# Altium PCB PCB1.PcbDoc
Units mm, origin at the board's own origin, x right, y up, seen from the top; angles counter-clockwise.
Board outline 75 x 33 mm, 2 copper layers (Top Layer, Bottom Layer); 60 components, 31 nets, 120 pads, 0 vias.
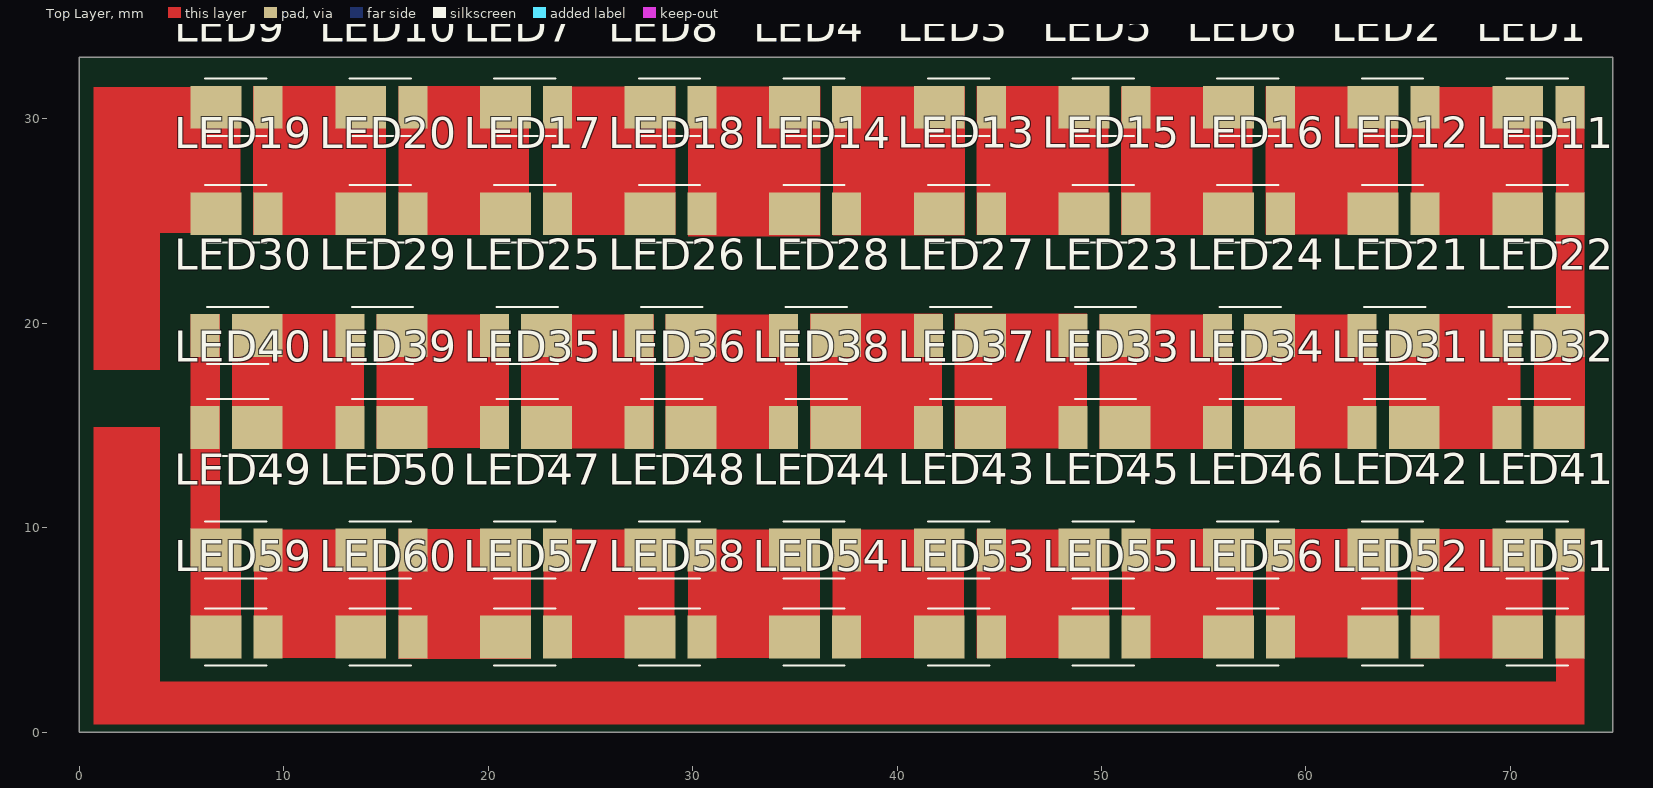
[diagram p0: Top Layer view]
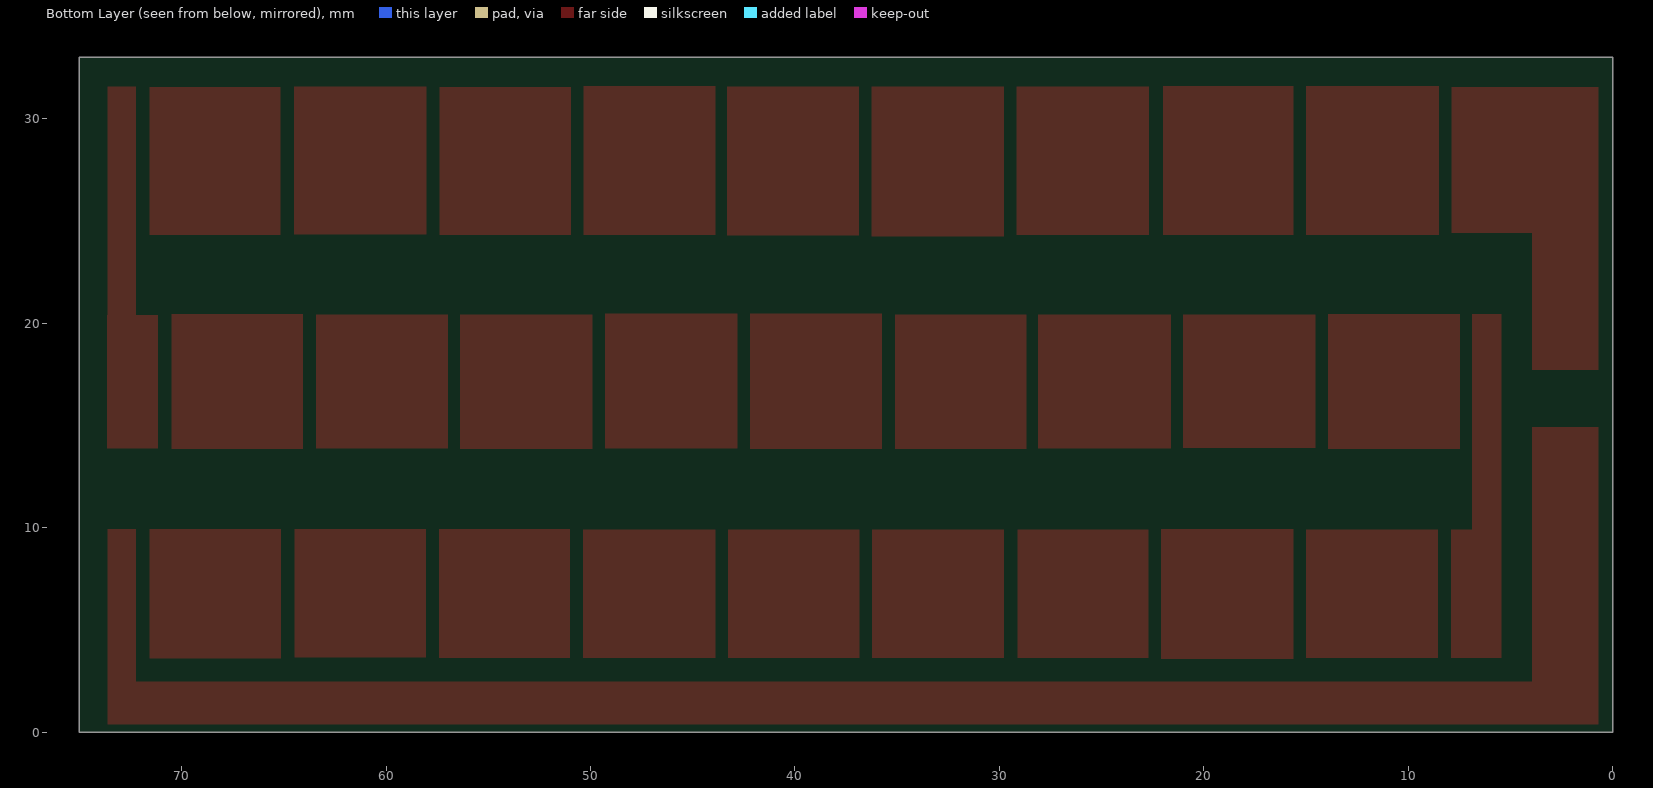
[diagram p1: Bottom Layer view, seen from below]

## Layer stack, top to bottom
Top Solder: solder mask 0.0102, Solder Resist, Dk 3.5
Top Layer: signal copper 0.0356
Dielectric 1: dielectric 0.32, FR-4, Dk 4.8
Bottom Layer: signal copper 0.0356
Bottom Solder: solder mask 0.0102, Solder Resist, Dk 3.5

## Board outline
0,0 75,0 75,33 0,33

## Design rules (kind name [scope] priority, off if disabled: settings)
Clearance [All] p1: gap=0.254 ignorepadtopadclearanceinfootprint=FALSE except(0: Arc-Hole Track-Hole SMDPad-Hole THPad-Hole Via-Hole Fill-Hole Poly-Hole Region-Hole Text-Hole)
PolygonConnect [All] p1: connectstyle=Relief reliefconductorwidth=0.254 reliefentries=4 polygonreliefangle="90 Angle" airgapwidth=0.254
RoutingVias [All] p1: holewidth=0.711 width=1.27 viastyle="Through Hole" minholewidth=0.711 minwidth=1.27 maxholewidth=0.711 maxwidth=1.27
SolderMaskExpansion [All] p1: expansion=0.102 istentingtop=FALSE
Width [All] p1: maxlimit=0.254 minlimit=0.254 preferedwidth=0.254
30 further rules are at their usual default settings.

## Components (designator, comment, footprint, x,y, rotation, side; value= is the part's Value field where it differs from the comment)
LED1 "ASMW-LA00-AUW0E" ASMWLA00AUW0E 71.31,30.56 r0 top
LED2 "ASMW-LA00-AUW0E" ASMWLA00AUW0E 64.236,30.56 r0 top
LED3 "ASMW-LA00-AUW0E" ASMWLA00AUW0E 43.012,30.56 r0 top
LED4 "ASMW-LA00-AUW0E" ASMWLA00AUW0E 35.938,30.56 r0 top
LED5 "ASMW-LA00-AUW0E" ASMWLA00AUW0E 50.087,30.56 r0 top
LED6 "ASMW-LA00-AUW0E" ASMWLA00AUW0E 57.161,30.56 r0 top
LED7 "ASMW-LA00-AUW0E" ASMWLA00AUW0E 21.789,30.56 r0 top
LED8 "ASMW-LA00-AUW0E" ASMWLA00AUW0E 28.863,30.56 r0 top
LED9 "ASMW-LA00-AUW0E" ASMWLA00AUW0E 7.64,30.56 r0 top
LED10 "ASMW-LA00-AUW0E" ASMWLA00AUW0E 14.714,30.56 r0 top
LED11 "ASMW-LA00-AUW0E" ASMWLA00AUW0E 71.31,25.35 r0 top
LED12 "ASMW-LA00-AUW0E" ASMWLA00AUW0E 64.236,25.35 r0 top
LED13 "ASMW-LA00-AUW0E" ASMWLA00AUW0E 43.012,25.35 r0 top
LED14 "ASMW-LA00-AUW0E" ASMWLA00AUW0E 35.938,25.35 r0 top
LED15 "ASMW-LA00-AUW0E" ASMWLA00AUW0E 50.087,25.35 r0 top
LED16 "ASMW-LA00-AUW0E" ASMWLA00AUW0E 57.161,25.35 r0 top
LED17 "ASMW-LA00-AUW0E" ASMWLA00AUW0E 21.789,25.35 r0 top
LED18 "ASMW-LA00-AUW0E" ASMWLA00AUW0E 28.863,25.35 r0 top
LED19 "ASMW-LA00-AUW0E" ASMWLA00AUW0E 7.64,25.35 r0 top
LED20 "ASMW-LA00-AUW0E" ASMWLA00AUW0E 14.714,25.35 r0 top
LED21 "ASMW-LA00-AUW0E" ASMWLA00AUW0E 64.346,19.4 r180 top
LED22 "ASMW-LA00-AUW0E" ASMWLA00AUW0E 71.42,19.4 r180 top
LED23 "ASMW-LA00-AUW0E" ASMWLA00AUW0E 50.197,19.4 r180 top
LED24 "ASMW-LA00-AUW0E" ASMWLA00AUW0E 57.271,19.4 r180 top
LED25 "ASMW-LA00-AUW0E" ASMWLA00AUW0E 21.899,19.4 r180 top
LED26 "ASMW-LA00-AUW0E" ASMWLA00AUW0E 28.973,19.4 r180 top
LED27 "ASMW-LA00-AUW0E" ASMWLA00AUW0E 43.122,19.4 r180 top
LED28 "ASMW-LA00-AUW0E" ASMWLA00AUW0E 36.048,19.4 r180 top
LED29 "ASMW-LA00-AUW0E" ASMWLA00AUW0E 14.824,19.4 r180 top
LED30 "ASMW-LA00-AUW0E" ASMWLA00AUW0E 7.75,19.4 r180 top
LED31 "ASMW-LA00-AUW0E" ASMWLA00AUW0E 64.346,14.9 r180 top
LED32 "ASMW-LA00-AUW0E" ASMWLA00AUW0E 71.42,14.9 r180 top
LED33 "ASMW-LA00-AUW0E" ASMWLA00AUW0E 50.197,14.9 r180 top
LED34 "ASMW-LA00-AUW0E" ASMWLA00AUW0E 57.271,14.9 r180 top
LED35 "ASMW-LA00-AUW0E" ASMWLA00AUW0E 21.899,14.9 r180 top
LED36 "ASMW-LA00-AUW0E" ASMWLA00AUW0E 28.973,14.9 r180 top
LED37 "ASMW-LA00-AUW0E" ASMWLA00AUW0E 43.122,14.9 r180 top
LED38 "ASMW-LA00-AUW0E" ASMWLA00AUW0E 36.048,14.9 r180 top
LED39 "ASMW-LA00-AUW0E" ASMWLA00AUW0E 14.824,14.9 r180 top
LED40 "ASMW-LA00-AUW0E" ASMWLA00AUW0E 7.75,14.9 r180 top
LED41 "ASMW-LA00-AUW0E" ASMWLA00AUW0E 71.31,8.9 r0 top
LED42 "ASMW-LA00-AUW0E" ASMWLA00AUW0E 64.236,8.9 r0 top
LED43 "ASMW-LA00-AUW0E" ASMWLA00AUW0E 43.012,8.9 r0 top
LED44 "ASMW-LA00-AUW0E" ASMWLA00AUW0E 35.938,8.9 r0 top
LED45 "ASMW-LA00-AUW0E" ASMWLA00AUW0E 50.087,8.9 r0 top
LED46 "ASMW-LA00-AUW0E" ASMWLA00AUW0E 57.161,8.9 r0 top
LED47 "ASMW-LA00-AUW0E" ASMWLA00AUW0E 21.789,8.9 r0 top
LED48 "ASMW-LA00-AUW0E" ASMWLA00AUW0E 28.863,8.9 r0 top
LED49 "ASMW-LA00-AUW0E" ASMWLA00AUW0E 7.64,8.9 r0 top
LED50 "ASMW-LA00-AUW0E" ASMWLA00AUW0E 14.714,8.9 r0 top
LED51 "ASMW-LA00-AUW0E" ASMWLA00AUW0E 71.31,4.65 r0 top
LED52 "ASMW-LA00-AUW0E" ASMWLA00AUW0E 64.236,4.65 r0 top
LED53 "ASMW-LA00-AUW0E" ASMWLA00AUW0E 43.012,4.65 r0 top
LED54 "ASMW-LA00-AUW0E" ASMWLA00AUW0E 35.938,4.65 r0 top
LED55 "ASMW-LA00-AUW0E" ASMWLA00AUW0E 50.087,4.65 r0 top
LED56 "ASMW-LA00-AUW0E" ASMWLA00AUW0E 57.161,4.65 r0 top
LED57 "ASMW-LA00-AUW0E" ASMWLA00AUW0E 21.789,4.65 r0 top
LED58 "ASMW-LA00-AUW0E" ASMWLA00AUW0E 28.863,4.65 r0 top
LED59 "ASMW-LA00-AUW0E" ASMWLA00AUW0E 7.64,4.65 r0 top
LED60 "ASMW-LA00-AUW0E" ASMWLA00AUW0E 14.714,4.65 r0 top

## Footprints (in the part's own frame and the unit in brackets; to place one, negate y for a bottom-side part, rotate by r counter-clockwise, add the part's x,y. Pads: shape width x height; smd on the part's side, far side on the other; paste and mask are expansions set on the pad)
ASMWLA00AUW0E [mm]
  rect 2.49x2.1 smd: 1(-0.95,0)
  rect 1.42x2.1 smd: 2(1.595,0)
  silkscreen extent -1.5,-1.4 1.5,1.4, body extent -1.75,-1.4 1.75,1.4, height 1

## Part data
LED1 LED2 LED3 LED4 LED5 LED6 LED7 LED8 LED9 LED10 LED11 LED12 LED13 LED14 LED15 LED16 LED17 LED18 LED19 LED20 LED21 LED22 LED23 LED24 LED25 LED26 LED27 LED28 LED29 LED30 LED31 LED32 LED33 LED34 LED35 LED36 LED37 LED38 LED39 LED40 LED41 LED42 LED43 LED44 LED45 LED46 LED47 LED48 LED49 LED50 LED51 LED52 LED53 LED54 LED55 LED56 LED57 LED58 LED59 LED60: "LED", Manufacturer_Name="Avago Technologies", Mouser Part Number=630-ASMW-LA00-AUW0E, Datasheet Link=https://docs.broadcom.com/docs/ASMW-LXXX-DS100, Height=0.9mm, Manufacturer_Part_Number=ASMW-LA00-AUW0E, Mouser Price/Stock=https://www.mouser.co.uk/ProductDetail/Broadcom-Avago/ASMW-LA00-AUW0E?qs=Mv7BduZupUh3TD%252BqME6K1Q%3D%3D

## Nets (pads, with @x,y where several pads share a name; then routed paths per layer and width w, separated by ;. In a path a pad name is that pad's centre, name@x,y a point inside that pad or via, vN(x,y) a via of type N, cw(c..) or ccw(c..) an arc to the next point about the centre after c; other vN are vias at no path point)
NetLED1_1: LED1.1 LED2.2 LED11.1 LED12.2
NetLED1_2: LED1.2 LED11.2 LED22.1 LED32.1
NetLED2_1: LED2.1 LED6.2 LED12.1 LED16.2
NetLED3_1: LED3.1 LED4.2 LED13.1 LED14.2
NetLED3_2: LED3.2 LED5.1 LED13.2 LED15.1
NetLED4_1: LED4.1 LED8.2 LED14.1 LED18.2
NetLED5_2: LED5.2 LED6.1 LED15.2 LED16.1
NetLED7_1: LED7.1 LED10.2 LED17.1 LED20.2
NetLED7_2: LED7.2 LED8.1 LED17.2 LED18.1
NetLED9_1: LED9.1 LED19.1
NetLED9_2: LED9.2 LED10.1 LED19.2 LED20.1
NetLED21_1: LED21.1 LED22.2 LED31.1 LED32.2
NetLED21_2: LED21.2 LED24.1 LED31.2 LED34.1
NetLED23_1: LED23.1 LED24.2 LED33.1 LED34.2
NetLED23_2: LED23.2 LED27.1 LED33.2 LED37.1
NetLED25_1: LED25.1 LED26.2 LED35.1 LED36.2
NetLED25_2: LED25.2 LED29.1 LED35.2 LED39.1
NetLED26_1: LED26.1 LED28.2 LED36.1 LED38.2
NetLED27_2: LED27.2 LED28.1 LED37.2 LED38.1
NetLED29_2: LED29.2 LED30.1 LED39.2 LED40.1
NetLED30_2: LED30.2 LED40.2 LED49.1 LED59.1
NetLED41_1: LED41.1 LED42.2 LED51.1 LED52.2
NetLED41_2: LED41.2 LED51.2
NetLED42_1: LED42.1 LED46.2 LED52.1 LED56.2
NetLED43_1: LED43.1 LED44.2 LED53.1 LED54.2
NetLED43_2: LED43.2 LED45.1 LED53.2 LED55.1
NetLED44_1: LED44.1 LED48.2 LED54.1 LED58.2
NetLED45_2: LED45.2 LED46.1 LED55.2 LED56.1
NetLED47_1: LED47.1 LED50.2 LED57.1 LED60.2
NetLED47_2: LED47.2 LED48.1 LED57.2 LED58.1
NetLED49_2: LED49.2 LED50.1 LED59.2 LED60.1

## Other copper
Top Layer:
  rectangle net NetLED41_2: 0.7,0.37 3.95,14.93
  rectangle net NetLED9_1: 0.7,17.7 3.95,31.54
  rectangle net NetLED9_1: 0.7,24.41 7.88,31.54
  rectangle net NetLED41_2: 0.7,0.37 73.63,2.46
  rectangle net NetLED41_2: 72.22,0.37 73.63,9.92
  rectangle net NetLED41_1: 65.14,3.6 71.57,9.94
  rectangle net NetLED42_1: 58.04,3.64 64.48,9.94
  rectangle net NetLED45_2: 50.99,3.63 57.42,9.94
  rectangle net NetLED43_2: 43.89,3.61 50.36,9.91
  rectangle net NetLED43_1: 36.84,3.63 43.28,9.91
  rectangle net NetLED44_1: 29.76,3.61 36.22,9.9
  rectangle net NetLED47_2: 22.7,3.61 29.12,9.91
  rectangle net NetLED47_1: 15.62,3.58 22.09,9.94
  rectangle net NetLED49_2: 8.55,3.61 14.99,9.91
  rectangle net NetLED30_2: 5.44,3.61 7.9,9.9
  rectangle net NetLED30_2: 5.44,3.61 6.87,20.44
  rectangle net NetLED29_2: 7.46,13.85 13.92,20.44
  rectangle net NetLED25_2: 14.54,13.89 21.01,20.43
  rectangle net NetLED25_1: 21.61,13.86 28.11,20.43
  rectangle net NetLED26_1: 28.68,13.85 35.11,20.43
  rectangle net NetLED27_2: 35.74,13.84 42.2,20.46
  rectangle net NetLED23_2: 42.81,13.86 49.3,20.46
  rectangle net NetLED23_1: 49.91,13.85 56.37,20.43
  rectangle net NetLED21_2: 56.97,13.86 63.43,20.43
  rectangle net NetLED21_1: 64.07,13.85 70.49,20.44
  rectangle net NetLED1_2: 71.16,13.86 73.64,20.41
  rectangle net NetLED1_2: 72.22,18.38 73.63,31.58
  rectangle net NetLED1_1: 65.17,24.31 71.56,31.56
  rectangle net NetLED2_1: 58.02,24.33 64.5,31.58
  rectangle net NetLED5_2: 50.96,24.31 57.38,31.56
  rectangle net NetLED3_2: 43.89,24.31 50.35,31.61
  rectangle net NetLED3_1: 36.86,24.29 43.31,31.58
  rectangle net NetLED4_1: 29.78,24.25 36.25,31.58
  rectangle net NetLED7_2: 22.69,24.31 29.16,31.58
  rectangle net NetLED7_1: 15.6,24.3 22,31.6
  rectangle net NetLED9_2: 8.5,24.3 15,31.6

## Silkscreen, mask and mechanical layers (free items; w line width, h text height)
Top Paste:
  rectangle: 1,11.9 3.6,14.6
  rectangle: 1,18 3.6,20.57